# Altium PCB PCB2.PcbDoc (part 2 of 3)
Units mil, origin at the board's own origin, x right, y up, seen from the top; angles counter-clockwise.
Board outline 7874.02 x 7874.02 mil, 2 copper layers (Top Layer, Bottom Layer); 456 components, 298 nets, 1240 pads, 257 vias.
Unrouted connection lines stored in the file: 581.
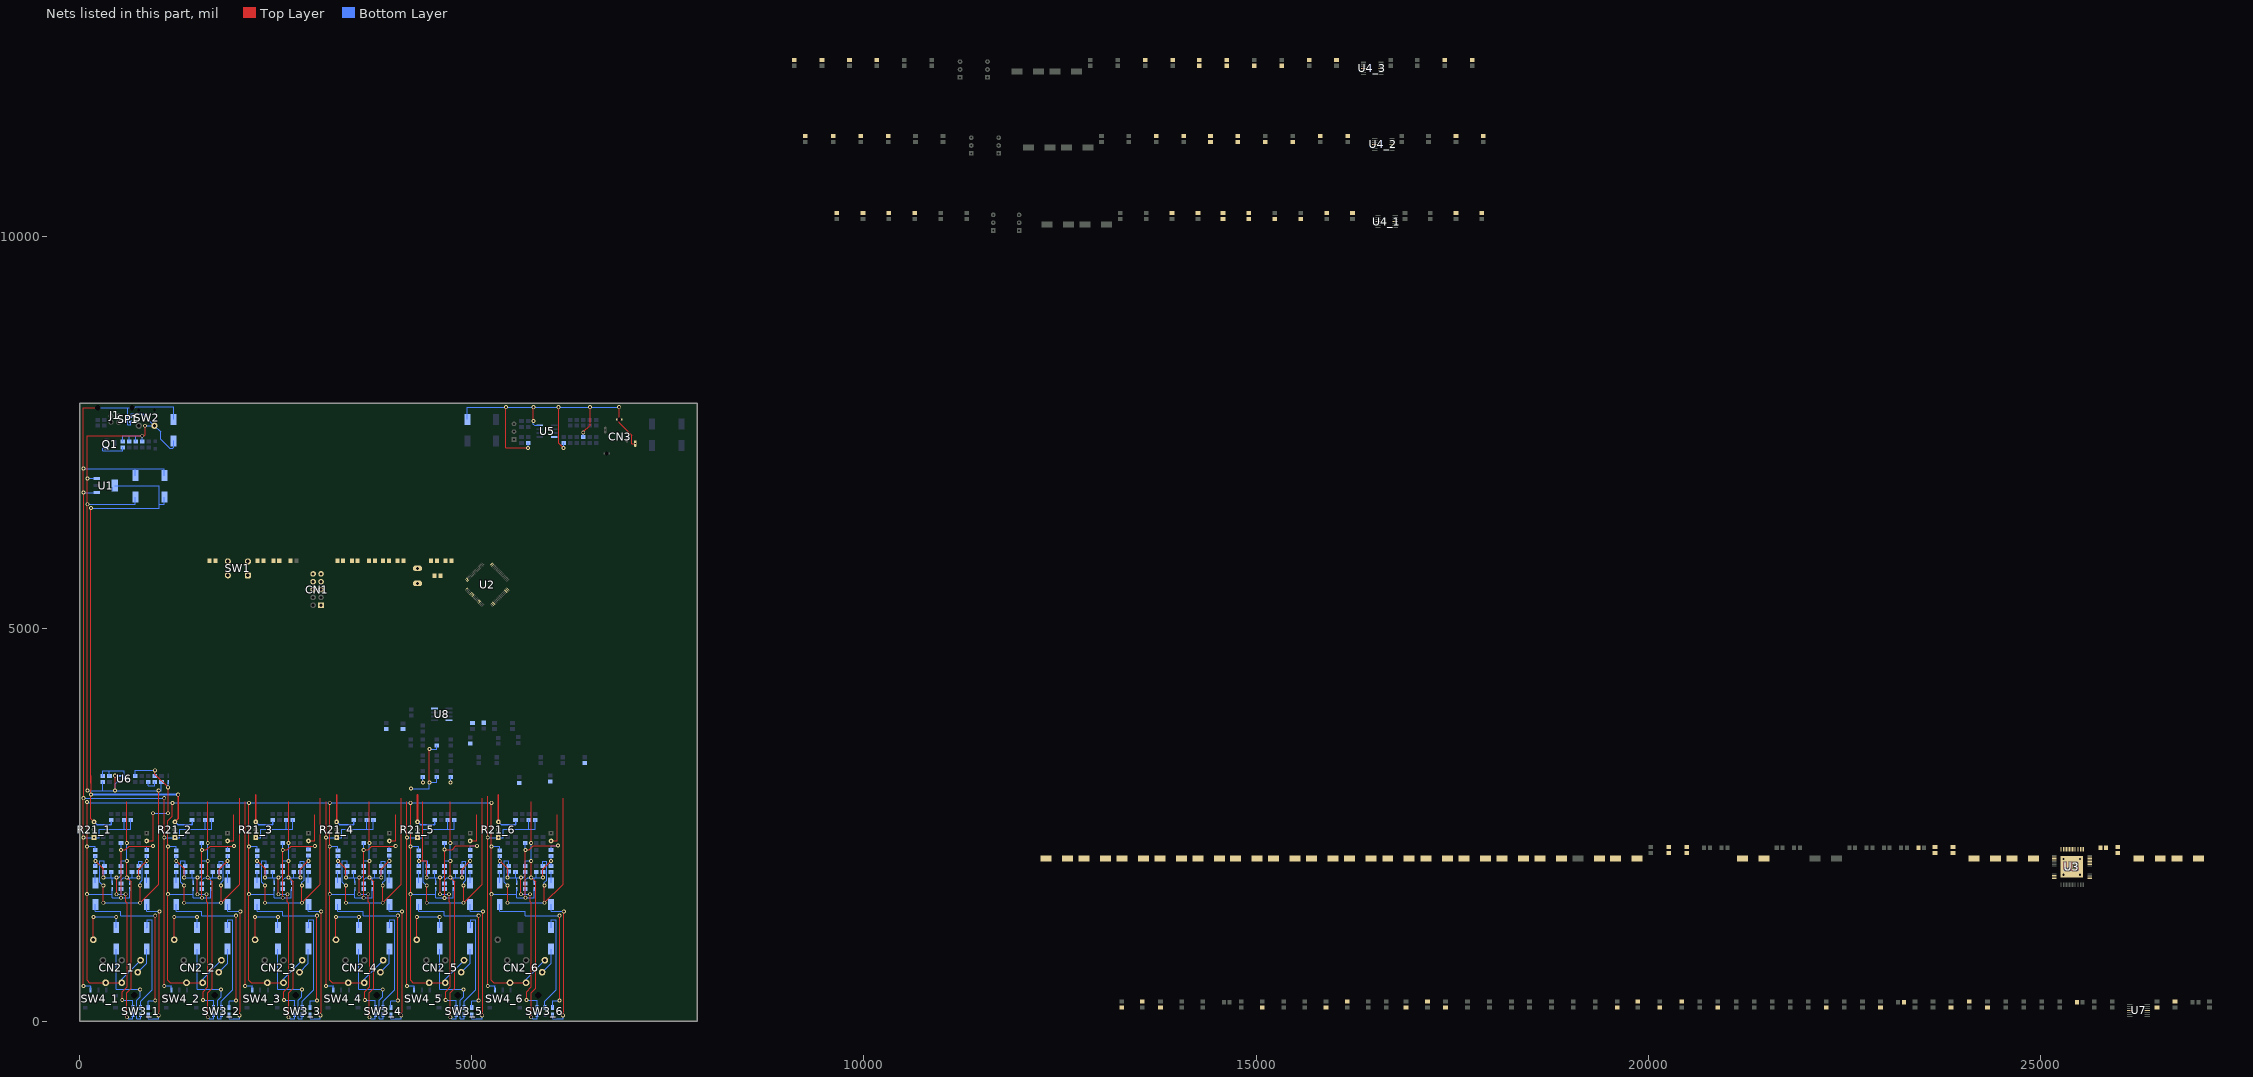
[diagram p2: the nets of this part, all layers, seen from the top]

## Footprints (in the part's own frame and the unit in brackets; to place one, negate y for a bottom-side part, rotate by r counter-clockwise, add the part's x,y. Pads: shape width x height; smd on the part's side, far side on the other; paste and mask are expansions set on the pad) (continued)
XTAL_HC49/US_HS [mm]
  oval 1.8x3 hole 1: 1(-2.44,0) 2(2.44,0)
  silkscreen extent -5.67,-2.32 5.67,2.32, body extent -5.59,-2.29 5.59,2.29, height 1

## Part data
B1: "Conecta distintos planos de masa por una pista"
C3 C4 C5 C6 C7 C8 C9 C10 C11 C12 C13 C15 C17_1 C17_2 C17_3 C17_4 C17_5 C17_6 C21 C22 C25 C26 C29 C30 C49_1 C49_2 C49_3 C49_4 C49_5 C49_6 C50_1 C50_2 C50_3 C50_4 C50_5 C50_6 C51_1 C51_2 C51_3 C52_1 C52_2 C52_3 C53_1 C53_2 C53_3 C54_1 C54_2 C54_3 C55_1 C55_2 C55_3 C56_1 C56_2 C56_3 C59_1 C59_2 C59_3 C60_1 C60_2 C60_3 C61 C63 C66 C68 C69 C70 C71 C72 C73 C74 C75 C76 C77 C78 C79 C80 C81 C82 C83 C84 C85 C86 C87 C88 C89_1 C89_2 C89_3 C89_4 C89_5 C89_6 C90_1 C90_2 C90_3 C90_4 C90_5 C90_6 C91_1 C91_2 C91_3 C91_4 C91_5 C91_6 C92_1 C92_2 C92_3 C92_4 C92_5 C92_6 C93_1 C93_2 C93_3 C93_4 C93_5 C93_6: "Capacitor de placas paralelas", tolerancia=X7R, Encapsulado=0805, tension=25V, Valor=100nF
CN1: "STLINK V2 Mini"
D1: library part Led, Color=Verde, Cod. Proveedor=67-1549-1-ND, Encapsulado=SMD, Link=https://www.digikey.com/product-detail/es/SML-LX0603GW-TR/67-1549-1-ND/304360?utm_campaign=buynow&WT.z_cid=ref_octopart_dkc_buynow&utm_medium=aggregator&curr=usd&site=us&utm_source=octopart, Proveedor=Digi-Key
D2 D3_1 D3_2 D3_3 D3_4 D3_5 D3_6 D4_1 D4_2 D4_3 D4_4 D4_5 D4_6: library part "Schottky Diode", Cod. Proveedor=1727-5845-1-ND, Encapsulado=SOD-128, Fabricante=Nexperia, Link=https://www.digikey.com/product-detail/es/PMEG6010EP,115/1727-5845-1-ND/2697507?utm_campaign=buynow&WT.z_cid=ref_octopart_dkc_buynow&utm_medium=aggregator&curr=usd&site=us&utm_source=octopart, Proveedor=Digi-Key
J1: "Conector micro USB tipo B", Cod. Proveedor=CO4821095, Encapsulado="SMD B TYPE SIDE ENTRY", Proveedor=Elemon
L1: library part Inductor, Cod. Proveedor=478-7137-1-ND, Encapsulado=SMD, Fabricante="AVX Corporation", Link=https://www.digikey.com/product-detail/es/L0201R68AHSTR/500/478-7137-1-ND/3455469?utm_campaign=buynow&WT.z_cid=ref_octopart_dkc_buynow&utm_medium=aggregator&curr=usd&site=us&utm_source=octopart, Proveedor=Digi-Key, Valor=0.68nH
Q1: library part NPN, "NPN", Cod. Proveedor=1727-2918-1-ND, Encapsulado=TO-236AB, Fabricante="Nexperia USA Inc.", Link=https://www.digikey.com/products/es?keywords=1727-2918-1-ND, Proveedor=Digi-Key
R1 R8_1 R8_2 R8_3 R8_4 R8_5 R8_6 R9_1 R9_2 R9_3 R9_4 R9_5 R9_6 R10_1 R10_2 R10_3 R10_4 R10_5 R10_6 R24_1 R24_2 R24_3 R25_1 R25_2 R25_3 R26_1 R26_2 R26_3 R27_1 R27_2 R27_3 R28_1 R28_2 R28_3 R29_1 R29_2 R29_3 R30_1 R30_2 R30_3 R31_1 R31_2 R31_3 R34_1 R34_2 R34_3 R35_1 R35_2 R35_3 R36_1 R36_2 R36_3 R37_1 R37_2 R37_3 R38 R39 R40 R41 R42 R43 R44 R45 R46 R47 R48 R50 R75 R78 R81 R82 R83 R84 R85 R86 R87 R88 R89 R92 R93 R94 R95 R96 R97 R98 R99 R100 R103 R104 R105 R106 R107 R108 R109 R110 R111 R114 R115 R116 R117 R118 R119 R120 R121 R122 R125 R126 R127 R128 R129 R130 R131 R132 R133 R136 R137 R138 R139 R140 R141 R142 R143: "Resistencia", tolerancia=10%, Potencia=1/4W
  R1: Valor=10K
  R8_1 R8_2 R8_3 R8_4 R8_5 R8_6 R34_1 R34_2 R34_3 R35_1 R35_2 R35_3 R39 R43 R47 R81 R85 R92 R97 R103 R107 R114 R118 R125 R129 R136 R140: Valor=1K
  R9_1 R9_2 R9_3 R9_4 R9_5 R9_6: Valor=15K
  R10_1 R10_2 R10_3 R10_4 R10_5 R10_6: Valor=8K2
  R24_1 R24_2 R24_3 R25_1 R25_2 R25_3 R28_1 R28_2 R28_3 R29_1 R29_2 R29_3 R30_1 R30_2 R30_3 R31_1 R31_2 R31_3: Valor=1K5
  R26_1 R26_2 R26_3 R27_1 R27_2 R27_3 R36_1 R36_2 R36_3 R37_1 R37_2 R37_3 R84 R95 R106 R117 R128 R139: Valor=47
  R38 R48 R78 R88 R89 R96 R100 R110 R111 R121 R122 R132 R133 R143: Valor=5K6
  R40 R44 R82 R86 R93 R98 R104 R108 R115 R119 R126 R130 R137 R141: Valor=6K8
  R41 R45: Valor=360R
  R42: Valor=4K7
  R46: Valor=47R
  R50: Valor=100R
  R75: Valor=1M
  R83 R87 R94 R99 R105 R109 R116 R120 R127 R131 R138 R142: Valor=360
R2 R3 R4 R5 R6 R7 R11 R22_1 R22_2 R22_3 R22_4 R22_5 R22_6 R23_1 R23_2 R23_3 R23_4 R23_5 R23_6 R51 R52 R53 R54 R55 R56 R57 R58 R59 R60 R61 R62 R63 R64 R65 R66 R67 R68 R69 R70 R71 R72 R73 R74 R76 R77 R79 R80 R90 R91 R101 R102 R112 R113 R123 R124 R134 R135 R144_1 R144_2 R144_3 R144_4 R144_5 R144_6 R145_1 R145_2 R145_3 R145_4 R145_5 R145_6 R146_1 R146_2 R146_3 R146_4 R146_5 R146_6 R147_1 R147_2 R147_3 R147_4 R147_5 R147_6: "Resistencia", tolerancia=5%
  R2: Potencia=1/10W, Valor=330R
  R3: Potencia=1/10W, Valor=47k
  R4 R5 R6 R7: Potencia=1/10W, Valor=22R
  R11: Potencia=1/10W, Valor=220K
  R22_1 R22_2 R22_3 R22_4 R22_5 R22_6 R144_1 R144_2 R144_3 R144_4 R144_5 R144_6 R147_1 R147_2 R147_3 R147_4 R147_5 R147_6: Potencia=1/4W, Valor=1K
  R23_1 R23_2 R23_3 R23_4 R23_5 R23_6: Potencia=1/4W, Valor=15K
  R51 R52 R53 R54 R55 R56 R57 R58 R59 R60 R61 R62 R63 R64 R65 R66 R67 R68 R69 R70 R71 R72 R73 R74 R79 R80 R90 R91 R101 R102 R112 R113 R123 R124 R134 R135: Potencia=1/4W, Valor=1M
  R76: Potencia=1/4W, Valor=33K
  R77: Potencia=1/4W, Valor=1K8
  R145_1 R145_2 R145_3 R145_4 R145_5 R145_6: Potencia=1/4W, Valor=6K8
  R146_1 R146_2 R146_3 R146_4 R146_5 R146_6: Potencia=1/4W, Valor="6 K8"
R12 R13 R14 R15 R16 R17 R18 R19 R20: "Resistencia", Potencia=1/10W, Valor=100R
R21_1 R21_2 R21_3 R21_4 R21_5 R21_6 R32_1 R32_2 R32_3 R33_1 R33_2 R33_3 R49: library part Potenciometer, tolerancia=10%, Potencia=1/4W, Valor=10K
SP1: library part "Double ESD", "Double rail-to-rail ESD protection diode", Cod. Proveedor=1727-3884-1-ND, Encapsulado=SOT-143B, Link=https://www.digikey.com/product-detail/es/PRTR5V0U2X,215/1727-3884-1-ND/1589981?utm_campaign=buynow&WT.z_cid=ref_octopart_dkc_buynow&utm_medium=aggregator&curr=usd&site=us&utm_source=octopart, Proveedor=Digi-Key
SW1 SW5_1 SW5_2 SW5_3 SW5_4 SW5_5 SW5_6: "Pulsador de 4 pines"
  SW5_1 SW5_2 SW5_3 SW5_4 SW5_5 SW5_6: Cod. Proveedor=GH1365-ND, Encapsulado="Montaje en panel, posterior", Fabricante="Grayhill Inc.", Link=https://www.digikey.com/product-detail/es/30-3/GH1365-ND/686796?utm_campaign=buynow&WT.z_cid=ref_octopart_dkc_buynow&utm_medium=aggregator&curr=usd&site=us&utm_source=octopart, Proveedor=Digi-Key
SW4_1 SW4_2 SW4_3 SW4_4 SW4_5 SW4_6: library part SWITCH_3, "Pulsador de 4 pines", Cod. Proveedor=563-1246-1-ND, Encapsulado=SMD, Fabricante="Nidec Copal Electronics", Link=https://www.digikey.com/product-detail/en/nidec-copal-electronics/CFPA-1FB4-A2T/563-1246-1-ND/2357767, Proveedor=Digi-Key
U1: "LDO Regulator", Cod. Proveedor=LM1117IMP-ADJ/NOPBCT-ND, Encapsulado=SOT-223-4, Fabricante="Texas Instruments", Link=https://www.digikey.com/product-detail/es/LM1117IMP-ADJ-NOPB/LM1117IMP-ADJ-NOPBCT-ND/483060?utm_campaign=buynow&WT.z_cid=ref_octopart_dkc_buynow&utm_medium=aggregator&curr=usd&site=us&utm_source=octopart, Proveedor=Digi-Key
U2: library part STM32F4xxR2, Manufacturer=STMicroelectronics, Manufacturer_Part_Number=stm32f4xxr2, _BOOT0="conectado a VDD o DGND a traves de R=10K", _BOOT0=0="0: Main Flash memory is selected as boot space", _BOOT0=1="1: System memory is selected as boot space", _VDD="Capa de 100nF", Cod. Proveedor=497-17428-ND, Encapsulado=64-LQFP, Link=https://www.digikey.com/product-detail/es/STM32F401RBT6/497-17428-ND/4755972?utm_campaign=buynow&WT.z_cid=ref_octopart_dkc_buynow&utm_medium=aggregator&curr=usd&site=us&utm_source=octopart, Proveedor=Digi-Key, Vendor=STMicroelectronics
U3: library part PCM3168A-Q1_PAP_, Manufacturer="Texas Instruments", Manufacturer_Part_Number=PCM3168A-Q1_PAP_64, Vendor="Texas Instruments"
U4_1 U4_2 U4_3 U7: library part Opamp_x4, "Integrado con 4 operacionales", Cod. Proveedor=296-22024-1-ND, Encapsulado=8-SOIC, Fabricante="Texas Instruments", Link=https://www.digikey.com/product-detail/es/OPA2134UA-2K5/296-22024-1-ND/301154?utm_campaign=buynow&WT.z_cid=ref_octopart_dkc_buynow&utm_medium=aggregator&curr=usd&site=us&utm_source=octopart, Proveedor=Digi-Key
U5: "Integrado con 2 operacionales"
U6: "Low IQ Boost/SEPIC/Inverting Converter with 1A, 60V Switch", Cod. Proveedor=LT8330ES6#TRMPBFCT-ND, Encapsulado=TSOT-23-6, Fabricante="Linear Technology/Analog Devices", Link=https://www.digikey.com/product-detail/es/LT8330ES6%2523TRMPBF/LT8330ES6%2523TRMPBFCT-ND/5361671?utm_campaign=buynow&WT.z_cid=ref_octopart_dkc_buynow&utm_medium=aggregator&curr=usd&site=us&utm_source=octopart, Proveedor=Digi-Key
U8: library part Opamp_x2, "Integrado con 2 operacionales", Cod. Proveedor=296-22024-1-ND, Encapsulado=8-SOIC, Fabricante="Texas Instruments", Link=https://www.digikey.com/product-detail/es/OPA2134UA-2K5/296-22024-1-ND/301154?utm_campaign=buynow&WT.z_cid=ref_octopart_dkc_buynow&utm_medium=aggregator&curr=usd&site=us&utm_source=octopart, Proveedor=Digi-Key
Y1: "Resonador cerámico", frecuencia=8MHZ
C1 C2 C14 C16_1 C16_2 C16_3 C16_4 C16_5 C16_6 C18_1 C18_2 C18_3 C18_4 C18_5 C18_6 C19 C20 C23 C24 C27 C28 C31 C32 C33 C34 C35 C36 C37 C38 C39 C40 C41 C42 C43 C44 C45 C46 C47_1 C47_2 C47_3 C47_4 C47_5 C47_6 C48_1 C48_2 C48_3 C48_4 C48_5 C48_6 C57_1 C57_2 C57_3 C58_1 C58_2 C58_3 C62 C64 C65 C67: tension=16V, Valor=10uF
SW2: Cod. Proveedor=EG2615-ND, Encapsulado=SMD, Fabricante=E-Switch, Link=https://www.digikey.com/product-detail/en/e-switch/800SP9B6M6RE/EG2615-ND/502079, Proveedor=Digi-Key
SW3_1 SW3_2 SW3_3 SW3_4 SW3_5 SW3_6: Cod. Proveedor=CKN10722TR-ND, Encapsulado=SMD, Fabricante=C&K, Link=https://www.digikey.com/product-detail/en/c-k/JS202011JAQN/CKN10722TR-ND/6137629, Proveedor=Digi-Key

## Via types
v1: diameter 50, hole 28, Top Layer to Bottom Layer, 253 vias
v2: diameter 55.12, hole 27.56, Top Layer to Bottom Layer, 4 vias

## Nets (pads, with @x,y where several pads share a name; then routed paths per layer and width w, separated by ;. In a path a pad name is that pad's centre, name@x,y a point inside that pad or via, vN(x,y) a via of type N, cw(c..) or ccw(c..) an arc to the next point about the centre after c; other vN are vias at no path point)
3V3_D: C2.1 C3.1 C4.1 C7.1 C8.1 C9.1 C10.1 C20.1 C22.1 C24.1 C26.1 CN1.7 CN1.8 R21_1.3 R21_2.3 R21_3.3 R21_4.3 R21_5.3 R21_6.3 R22_1.2 R22_2.2 R22_3.2 R22_4.2 R22_5.2 R22_6.2 U1.4 U2.1 U2.13 U2.19 U2.32 U2.48 U2.64 U3.4 U3.12 U3.42 U3.46 | length 10480
  Top Layer w15: 145.18,2931.14 145.18,2949.25 145.85,2949.92 145.85,3124.86 145.18,3125.53 ; 145.21,2933.07 145.21,2888.74 145.21,2579.39 R21_1.3@184.55,2540.06 ; 145.18,3033.96 v1(145.18,6540.35)
  Top Layer w20: R21_2.3@1215.55,2540.06 1257.38,2581.89 v1(1257.38,2886.74) ; R21_3.3@2246.55,2540.06 2246.55,2883.86 ; R21_4.3@3277.56,2540.06 3277.56,2883.86 ; R21_5.3@4308.56,2540.06 4308.56,2884.44 ; R21_6.3@5339.57,2540.06 5339.57,2886.32
  Bottom Layer w15: v1(145.18,6540.35) 1016.24,6540.35 1016.24,6587.11 ; U1.4@448.82,6828.25 1016.24,6828.25 1016.24,6587.11 ; C2.1@1082.67,6678.94 1082.67,6587.11 1016.24,6587.11
  Bottom Layer w20: v1(145.18,2888.78) 1255.34,2888.78 v1(1257.38,2886.74) ; R21_1.3@184.55,2540.06 219.69,2504.92 403.54,2504.92 R22_1.2@403.54,2542.91 ; R21_2.3@1215.55,2540.06 1250.69,2504.92 1434.55,2504.92 R22_2.2@1434.55,2542.91 ; R21_3.3@2246.55,2540.06 2281.69,2504.92 2465.55,2504.92 R22_3.2@2465.55,2542.91 ; R21_4.3@3277.56,2540.06 3312.7,2504.92 3496.56,2504.92 R22_4.2@3496.56,2542.91 ; R21_5.3@4308.56,2540.06 4343.7,2504.92 4527.56,2504.92 R22_5.2@4527.56,2542.91 ; R21_6.3@5339.57,2540.06 5374.7,2504.92 5558.56,2504.92 R22_6.2@5558.56,2542.91
5V: C1.1 C14.1 C15.1 C19.1 C21.1 C23.1 C25.1 C28.1 C29.1 C30.1 C68.1 CN1.9 CN1.10 L1.1 R2.2 R3.2 R4.1 R51.1 R53.1 R55.1 R57.1 R59.1 R61.1 R63.1 R65.1 R67.1 R69.1 R71.1 R73.1 R79.1 R90.1 R101.1 R112.1 R123.1 R134.1 SP1.4 SW2.2 U1.3 U3.3 U3.14 U3.34 U3.49 U4_1.4 U4_2.4 U4_3.4 U5.4 U6.4 U6.6 U7.4 U8.8 | length 28785.3
  Top Layer w15: v1(100.88,2937.96) v1(100.89,6589.57) v1(100.89,6919.29) 100.89,7463.09 v1(799.7,7463.09) 824.31,7463.09 835.93,7474.7 v1(835.93,7590.35) ; v1@302.66,1510.83 v1(302.66,1727.36) ; v1(453.34,2938.57) v1(453.34,3128.57) ; v1(772.64,1727.36) v1(772.64,1508.37) 1008.86,1744.59 v1(1008.86,2937.99) ; v1@1333.66,1510.83 v1(1333.66,1727.36) ; v1(1803.64,1727.36) v1(1803.64,1508.37) 2039.86,1744.59 2039.86,2839.57 ; v1@2364.67,1510.83 v1(2364.67,1727.36) ; v1(2834.65,1727.36) v1(2834.65,1508.37) 3070.87,1744.59 3070.87,2840.15 ; v1@3395.67,1510.83 v1(3395.67,1727.36) ; v1(3865.65,1727.36) v1(3865.65,1508.37) 4101.87,1744.59 4101.87,2839.57 ; v1@4424.21,1508.37 4426.67,1510.83 v1(4426.67,1727.36) ; v1(4896.65,1727.36) v1(4896.65,1508.37) 5132.87,1744.59 5132.87,2839.57 ; v1@5457.68,1511.62 v1(5457.68,1728.16) ; v1(5927.66,1728.16) v1(5927.66,1509.16) 6163.88,1745.38 6163.88,2842.03
  Bottom Layer w15: v1(100.88,2937.96) 139.45,2937.96 139.48,2937.99 297.74,2937.99 ; v1(100.89,6589.57) 123.03,6589.57 711.12,6589.56 C1.1@711.12,6678.94 ; v1(100.89,6919.29) 183.07,6919.29 U1.3@183.56,6918.8 ; C68.1@297.74,3049.81 297.74,2937.99 ; v1(302.66,1508.37) v1(772.64,1508.37) ; v1(302.66,1727.36) 258.37,1771.65 258.37,2042.32 317.42,2042.32 R51.1@317.42,1978.04 ; v1(453.34,3128.57) 523.22,3128.57 U6.6@524.69,3127.09 ; U6.4@524.69,3052.29 478.85,3052.29 453.34,3026.78 v1(453.34,2938.57) ; C15.1@548.72,7389.76 548.72,7463.09 632.38,7463.09 ; R3.2@632.38,7389.76 632.38,7463.09 ; SP1.4@657.48,7705.71 657.48,7741.14 804.63,7741.14 SW2.2@955.41,7590.35 ; R4.1@715.94,7390.45 715.94,7463.09 ; R53.1@752.95,1978.04 752.95,2039.86 801.3,2039.86 801.3,1797.85 772.64,1769.19 v1(772.64,1727.36) ; R2.2@799.6,7390.45 799.7,7390.56 v1(799.7,7463.09) 715.94,7463.09 ; v1(835.93,7590.35) SW2.2@955.41,7590.35 ; L1.1@1043.89,3049.34 1043.89,2937.99 v1(1008.86,2937.99) 453.34,2937.99 v1(453.34,2938.57) ; C14.1@1198.33,7397.45 1198.33,7312.99 1188.48,7303.15 1151.57,7303.15 1033.46,7421.26 1033.46,7512.3 SW2.2@955.41,7590.35 ; v1(1333.66,1508.37) v1(1803.64,1508.37) ; v1(1333.66,1727.36) 1289.37,1771.65 1289.37,2042.32 1348.43,2042.32 R55.1@1348.43,1978.04 ; R57.1@1783.96,1978.04 1783.96,2039.86 1832.3,2039.86 1832.3,1797.85 1803.64,1769.19 v1(1803.64,1727.36) ; v1(2364.67,1508.37) v1(2834.65,1508.37) ; v1(2364.67,1727.36) 2320.37,1771.65 2320.37,2042.32 2379.43,2042.32 R59.1@2379.43,1978.04 ; R61.1@2814.96,1978.04 2814.96,2039.86 2863.31,2039.86 2863.31,1797.85 2834.65,1769.19 v1(2834.65,1727.36) ; v1(3395.67,1508.37) v1(3865.65,1508.37) ; v1(3395.67,1727.36) 3351.38,1771.65 3351.38,2042.32 3410.43,2042.32 R63.1@3410.43,1978.04 ; R65.1@3845.96,1978.04 3845.96,2039.86 3894.31,2039.86 3894.31,1797.85 3865.65,1769.19 v1(3865.65,1727.36) ; v1@4424.21,1508.37 v1(4426.67,1508.37) v1(4896.65,1508.37) ; v1(4426.67,1727.36) 4382.38,1771.65 4382.38,2042.32 4441.44,2042.32 R67.1@4441.44,1978.04 ; R69.1@4876.97,1978.04 4876.97,2039.86 4925.31,2039.86 4925.31,1797.85 4896.65,1769.19 v1(4896.65,1727.36) ; v1(5457.68,1509.16) v1(5927.66,1509.16) ; v1(5457.68,1728.16) 5413.39,1772.45 5413.39,2043.12 5472.44,2043.12 R71.1@5472.44,1978.84 ; R73.1@5907.97,1978.84 5907.97,2040.66 5956.32,2040.66 5956.32,1798.65 5927.66,1769.99 v1(5927.66,1728.16) ; 297.74,2937.99 452.76,2937.99 v1(453.34,2938.57) ; 632.38,7463.09 715.94,7463.09
48V: C69.1 D2.1 R75.2 SW5_1.2 SW5_2.2 SW5_3.2 SW5_4.2 SW5_5.2 SW5_6.2 | length 3770.7
  Top Layer w15: SW5_1.2@856.3,2296.65 937.5,2296.65 v1(937.5,2650.1) ; v1(960.23,3197.47) 960.23,3149.55 v1(1129.43,2980.35) v1(1129.43,2650.1) ; SW5_2.2@1887.3,2296.65 1968.5,2296.65 1968.5,2627.95 ; SW5_3.2@2918.31,2296.65 2999.51,2296.65 2999.51,2627.95 ; SW5_4.2@3949.31,2296.65 4030.51,2296.65 4030.51,2627.95 ; SW5_5.2@4980.31,2296.65 5061.52,2296.65 5061.52,2627.95 ; SW5_6.2@6011.32,2296.65 6092.52,2296.65 6092.52,2627.95
  Bottom Layer w15: R75.2@708.8,3124.61 708.8,3197.47 v1(960.23,3197.47) C69.1@960.23,3124.14 ; v1(937.5,2650.1) v1(1129.43,2650.1) ; v1(1129.43,2980.35) D2.1@1129.43,3046.96
AGND: B1.1 C19.2 C21.2 C23.2 C25.2 C28.2 C29.2 C30.2 C31.2 C32.2 C35.2 C36.2 C59_1.2 C59_2.2 C59_3.2 C60_1.2 C60_2.2 C60_3.2 C66.2 C67.2 C68.2 C69.2 C70.2 C73.2 C77.2 C79.2 C82.2 C85.2 C88.2 C91_1.2 C91_2.2 C91_3.2 C91_4.2 C91_5.2 C91_6.2 CN2_1.1 CN2_1.G CN2_1.S CN2_2.1 CN2_2.G CN2_2.S CN2_3.1 CN2_3.G CN2_3.S CN2_4.1 CN2_4.G CN2_4.S CN2_5.1 CN2_5.G CN2_5.S CN2_6.1 CN2_6.G CN2_6.S CN3.1 CN3.2 D3_1.2 D3_2.2 D3_3.2 D3_4.2 D3_5.2 D3_6.2 D4_1.2 D4_2.2 D4_3.2 D4_4.2 D4_5.2 D4_6.2 R47.1 R48.1 R52.2 R54.2 R56.2 R58.2 R60.2 R62.2 R64.2 R66.2 R68.2 R70.2 R72.2 R74.2 R77.1 R80.2 R88.1 R91.2 R100.1 R102.2 R110.1 R113.2 R121.1 R124.2 R132.1 R135.2 R143.1 U3.2 U3.16 U3.33 U3.39 U3.40 U3.43 U3.44 U3.45 U3.50 U3.EPAD U4_1.11 U4_2.11 U4_3.11 U5.8 U6.2 U7.11 U8.4 | length 43564.2
  Top Layer w15: v1@95.58,1618.3 95.58,519.57 125.87,489.28 CN2_1.S@332.8,489.28 CN2_1.G@537.8,489.28 ; v1@95.58,1619.09 v1@95.58,2226.07 ; v1(96.38,2226.07) v1(96.38,2794.86) ; v1(529.03,1572.32) v1(529.04,2182.58) ; v1(529.04,2182.58) 585.63,2182.58 634.84,2231.79 v1(937.5,2231.79) ; v1@1126.59,1618.3 1126.59,519.57 1156.88,489.28 CN2_2.S@1363.8,489.28 CN2_2.G@1568.8,489.28 ; v1@1126.59,1619.09 v1@1126.59,2226.07 ; v1(1127.38,2226.07) 1127.38,2557.01 1183.56,2613.19 v1(1183.55,2780.48) ; v1(1560.03,1572.32) v1(1560.04,2182.58) ; v1(1560.04,2182.58) 1616.63,2182.58 1665.85,2231.79 v1(1968.5,2231.79) ; v1@2157.59,1618.3 2157.59,519.57 2187.88,489.28 CN2_3.S@2394.8,489.28 CN2_3.G@2599.8,489.28 ; v1@2157.59,1619.09 v1@2157.59,2226.07 ; v1(2158.39,2226.07) v1(2158.39,2782.56) ; v1(2591.04,1572.32) v1(2591.04,2182.58) ; v1(2591.04,2182.58) 2647.64,2182.58 2696.85,2231.79 v1(2999.51,2231.79) ; v1@3188.59,1618.3 3188.59,519.57 3218.89,489.28 CN2_4.S@3425.81,489.28 CN2_4.G@3630.81,489.28 ; v1@3188.59,1619.09 v1@3188.59,2226.07 ; v1(3189.39,2226.07) v1(3189.39,2782.56) ; v1(3622.04,1572.32) v1(3622.05,2182.58) ; v1(3622.05,2182.58) 3678.64,2182.58 3727.85,2231.79 v1(4030.51,2231.79) ; v1@4219.6,1618.3 4219.6,519.57 4249.89,489.28 CN2_5.S@4456.81,489.28 CN2_5.G@4661.81,489.28 ; v1@4219.6,1619.09 v1@4219.6,2226.07 ; v1(4220.39,2226.07) v1(4220.39,2782.56) ; v1(4460.57,3042.81) v1(4460.57,3468.5) ; v1@4650.59,1569.88 4653.04,1572.34 4653.04,2187.49 4751.48,2187.5 4798.23,2234.25 v1(5066.44,2234.25) ; v1@5250.6,1618.3 5250.6,519.57 5280.89,489.28 CN2_6.S@5487.81,489.28 CN2_6.G@5692.81,489.28 ; v1@5250.6,1619.09 v1@5250.6,2226.07 ; v1(5251.4,2226.07) v1(5251.4,2782.56) ; v1(5435.53,7827.26) 5435.53,7308.07 v1(5718.5,7308.07) ; v1(5684.05,1572.32) v1@5684.05,2182.57 ; v1(5684.06,2182.58) 5730.81,2182.58 5784.94,2236.71 v1(6099.9,2236.71) ; v1(5787.4,7650.1) v1(5787.4,7827.26) ; v1(6107.28,7827.26) 6107.28,7369.59 v1(6171.26,7305.61) ; v1(6422.21,7504.83) 6422.21,7512.34 6508.37,7598.5 v1(6508.37,7827.26) ; v1(6879.92,7827.26) CN3.1@6879.92,7669.52 6879.92,7627.96 7039.86,7468.01 7039.86,7362.52 CN3.2@7084.92,7362.52
  Bottom Layer w10: v1(96.76,1618.3) 418.31,1618.3 ; D3_1.2@418.31,1683.86 418.31,1618.3 ; D4_1.2@639.76,1683.86 639.76,1574.8 529.04,1574.8 418.31,1574.8 418.31,1618.3 ; v1(1127.76,1618.3) 1449.31,1618.3 ; D3_2.2@1449.31,1683.86 1449.31,1618.3 ; D4_2.2@1670.77,1683.86 1670.77,1572.34 1449.31,1572.34 1449.31,1618.3 ; v1(2158.77,1618.3) 2480.31,1618.3 ; D3_3.2@2480.32,1683.86 2480.31,1618.3 ; D4_3.2@2701.77,1683.86 2701.77,1574.8 2480.31,1574.8 2480.31,1618.3 ; v1(3189.77,1618.3) 3511.32,1618.3 ; D3_4.2@3511.32,1683.86 3511.32,1618.3 ; D4_4.2@3732.78,1683.86 3732.78,1569.88 3511.32,1569.88 3511.32,1618.3 ; v1(4220.78,1618.3) 4542.32,1618.3 ; D3_5.2@4542.32,1683.86 4542.32,1618.3 ; D4_5.2@4766.24,1681.4 D4_5.2@4763.78,1683.86 4763.78,1572.34 4542.32,1572.34 4542.32,1618.3 ; v1(5251.78,1618.3) 5573.33,1618.3 ; D3_6.2@5573.33,1683.86 5573.33,1618.3 ; D4_6.2@5794.78,1683.86 5794.78,1569.88 5573.33,1569.88 5573.33,1618.3
  Bottom Layer w15: v1@95.96,2795.28 v1(96.38,2794.86) 110.76,2780.48 v1(1183.55,2780.48) v1@2157.97,2780.48 ; v1(96.38,2226.07) 201.77,2226.07 R52.2@201.77,2180.31 ; C68.2@297.74,3124.61 297.74,3189.59 381.98,3189.59 ; C70.2@381.4,3124.61 381.4,3189.01 381.98,3189.59 ; v1(529.03,1572.32) v1@529.04,1574.8 ; v1(529.04,2182.58) C91_1.2@529.04,2272.83 ; CN2_1.G@537.8,489.28 537.8,536.28 CN2_1.1@777.8,776.28 ; U6.2@614.69,3089.69 571.94,3089.69 571.94,3189.59 381.98,3189.59 ; R54.2@856.3,2180.31 856.3,2231.79 v1(937.5,2231.79) ; R77.1@875.98,3049.81 875.98,3003.08 960.23,3003.08 C69.2@960.23,3049.34 ; v1(1127.38,2226.07) 1232.78,2226.07 R56.2@1232.78,2180.31 ; v1(1560.04,2182.58) C91_2.2@1560.04,2272.83 ; CN2_2.G@1568.8,489.28 1568.8,536.28 CN2_2.1@1808.8,776.28 ; R58.2@1887.3,2180.31 1887.3,2231.79 v1(1968.5,2231.79) ; v1@2157.97,2782.97 v1(2158.39,2782.56) v1(3189.39,2782.56) v1(4220.39,2782.56) v1@5250.98,2782.56 ; v1(2158.39,2226.07) 2263.78,2226.07 R60.2@2263.78,2180.31 ; v1(2591.04,2182.58) C91_3.2@2591.04,2272.83 ; CN2_3.G@2599.8,489.28 2599.8,536.28 CN2_3.1@2839.8,776.28 ; R62.2@2918.31,2180.31 2918.31,2231.79 v1(2999.51,2231.79) ; v1(3189.39,2226.07) 3294.78,2226.07 R64.2@3294.78,2180.31 ; v1(3622.05,2182.58) C91_4.2@3622.05,2272.83 ; CN2_4.G@3630.81,489.28 3630.81,536.28 CN2_4.1@3870.81,776.28 ; R66.2@3949.31,2180.31 3949.31,2231.79 v1(4030.51,2231.79) ; v1(4220.39,2226.07) 4325.79,2226.07 R68.2@4325.79,2180.31 ; v1(4224.76,2964.49) 4460.57,2964.49 v1(4460.57,3042.81) 4554.07,3042.81 R132.1@4554.07,3113.68 ; v1(4460.57,3468.5) 4554.07,3468.5 C85.2@4554.07,3512.3 ; v1(4653.05,2187.5) C91_5.2@4653.05,2272.83 ; CN2_5.G@4661.81,489.28 4661.81,536.28 CN2_5.1@4901.81,776.28 ; C67.2@4944.49,7671.45 4944.49,7827.26 v1(5435.53,7827.26) v1(5787.4,7827.26) v1(6107.28,7827.26) v1(6508.37,7827.26) v1(6879.92,7827.26) ; R70.2@4980.31,2180.31 4980.31,2234.25 v1(5066.44,2234.25) ; v1@5250.98,2782.97 v1(5251.4,2782.56) ; v1(5251.4,2226.07) 5356.79,2226.07 R72.2@5356.79,2180.31 ; v1(5684.06,2182.58) C91_6.2@5684.06,2272.83 ; CN2_6.G@5692.81,489.28 5692.81,536.28 CN2_6.1@5932.81,776.28 ; v1(5718.5,7308.07) R47.1@5718.51,7371.56 ; v1(5787.4,7650.1) 5787.4,7610.73 5800.98,7597.15 U5.8@5866.65,7597.15 ; R74.2@6011.32,2180.31 6011.32,2236.71 v1(6099.9,2236.71) ; v1(6171.26,7305.61) C66.2@6171.26,7371.56 ; v1(6422.21,7504.83) R48.1@6422.24,7446.36 R48.1@6422.24,7446.36
  other v1: 4653.05,1569.88
  other v2: 25295.83,1865.61 25505.83,1865.61 25295.83,2065.61 25505.83,2065.61
DGND: B1.2 C1.2 C2.2 C3.2 C4.2 C5.1 C6.1 C7.2 C8.2 C9.2 C10.2 C11.2 C12.2 C13.2 C14.2 C15.2 C20.2 C22.2 C24.2 C26.2 C49_1.2 C49_2.2 C49_3.2 C49_4.2 C49_5.2 C49_6.2 C50_1.2 C50_2.2 C50_3.2 C50_4.2 C50_5.2 C50_6.2 CN1.5 CN1.6 J1.5 J1.6 Q1.2 R1.1 R11.1 R21_1.1 R21_2.1 R21_3.1 R21_4.1 R21_5.1 R21_6.1 SP1.1 SW1.2 SW4_1.3 SW4_2.3 SW4_3.3 SW4_4.3 SW4_5.3 SW4_6.3 U1.1 U2.12 U2.18 U2.31 U2.47 U2.63 U3.11 U3.47 | length 29996.4
  Top Layer w15: v1(49.21,447.83) v1(49.21,2340.06) 49.21,2795.28 ; v1(49.21,6737.7) v1(49.21,7044.78) 49.21,7819.88 J1.6@231.3,7819.88 ; 49.8,2795.86 49.21,2795.28 ; v1@54.13,6737.7 49.21,6732.78 v1(49.21,2842.03) 49.21,2795.28 ; v1(1080.22,447.83) v1(1080.22,2340.06) v1(1080.22,2841.93) ; v1(2111.22,447.83) 2111.22,2795.28 ; v1(3142.22,447.83) v1(3142.22,2340.06) 3142.22,2795.28 ; v1(4173.23,447.83) v1(4173.23,2340.06) 4173.23,2795.28 ; v1(5204.23,447.83) v1(5204.23,2340.06) 5204.23,2864.17
  Bottom Layer w10: v1(49.21,447.83) 138.39,447.83 140.55,445.67 SW4_1.3@140.55,397.64 ; v1(1080.22,447.83) 1169.39,447.83 1171.56,445.67 SW4_2.3@1171.56,397.64 ; v1(2111.22,447.83) 2200.39,447.83 2202.56,445.67 SW4_3.3@2202.56,397.64 ; v1(3142.22,447.83) 3231.4,447.83 3233.56,445.67 SW4_4.3@3233.56,397.64 ; v1(4173.23,447.83) 4262.4,447.83 4264.57,445.67 SW4_5.3@4264.57,397.64 ; v1(5204.23,447.83) 5293.41,447.83 5295.57,445.67 SW4_6.3@5295.57,397.64
  Bottom Layer w15: v1(49.21,2340.06) R21_1.1@184.55,2340.06 248.52,2340.06 248.52,2448.33 570.87,2448.33 ; v1(49.21,2842.03) 81.2,2842.03 v1(1080.22,2841.93) ; v1(49.21,6737.7) U1.1@183.56,6737.7 ; v1(49.21,7044.78) 711.12,7044.78 ; J1.6@231.3,7819.88 612.7,7819.88 ; Q1.2@342.52,7311.52 297.74,7311.52 297.74,7271.16 548.72,7271.16 C15.2@548.72,7314.96 ; C49_1.2@570.87,2566.34 570.87,2448.33 ; SP1.1@649.61,7638.78 649.61,7605.81 612.7,7605.81 612.7,7819.88 ; C50_1.2@654.53,2566.34 654.53,2448.33 570.87,2448.33 ; C1.2@711.12,6952.94 711.12,7044.78 ; v1(1080.22,2340.06) R21_2.1@1215.55,2340.06 1279.53,2340.06 1279.53,2448.33 1601.87,2448.33 ; C2.2@1082.67,6952.94 1082.67,7044.78 711.12,7044.78 ; C14.2@1198.33,7671.45 1198.33,7834.65 718.5,7834.65 703.74,7819.88 J1.5@668.31,7819.88 612.7,7819.88 ; C49_2.2@1601.87,2566.34 1601.87,2448.33 ; C50_2.2@1685.53,2566.34 1685.53,2448.33 1601.87,2448.33 ; R21_3.1@2246.55,2340.06 2310.53,2340.06 2310.53,2448.33 2632.87,2448.33 ; C49_3.2@2632.87,2566.34 2632.87,2448.33 ; C50_3.2@2716.54,2566.34 2716.54,2448.33 2632.87,2448.33 ; v1(3142.22,2340.06) R21_4.1@3277.56,2340.06 3341.54,2340.06 3341.54,2448.33 3663.88,2448.33 ; C49_4.2@3663.88,2566.34 3663.88,2448.33 ; C50_4.2@3747.54,2566.34 3747.54,2448.33 3663.88,2448.33 ; v1(4173.23,2340.06) R21_5.1@4308.56,2340.06 4372.54,2340.06 4372.54,2448.33 4694.88,2448.33 ; C49_5.2@4694.88,2566.34 4694.88,2448.33 ; C50_5.2@4778.54,2566.34 4778.54,2448.33 4694.88,2448.33 ; v1(5204.23,2340.06) R21_6.1@5339.57,2340.06 5403.54,2340.06 5403.54,2448.33 5725.89,2448.33 ; C49_6.2@5725.89,2566.34 5725.89,2448.33 ; C50_6.2@5809.55,2566.34 5809.55,2448.33 5725.89,2448.33
NetC5_2: C5.2 U2.5 Y1.1
NetC6_2: C6.2 U2.6 Y1.2
NetC11_1: C11.1 C12.1 U2.30
NetC13_1: C13.1 CN1.1 SW1.1 U2.7
NetC16_1_1: C16_1.1 R8_1.1 | length 111
  Bottom Layer w15: C16_1.1@201.77,1762.68 201.77,1873.71
NetC16_1_2: C16_1.2 SW3_1.1 | length 2162
  Top Layer w15: v1(964.57,260.83) v1(964.57,1343.5)
  Bottom Layer w15: C16_1.2@201.77,1488.68 201.77,1397.64 525.96,1397.64 525.96,1343.5 v1(964.57,1343.5) ; SW3_1.1@875.98,175.2 875.98,255.91 880.91,260.83 890.75,260.83 v1(964.57,260.83)
NetC16_2_1: C16_2.1 R8_2.1 | length 140.6
  Bottom Layer w15: C16_2.1@1232.78,1762.68 R8_2.1@1232.78,1903.24
NetC16_2_2: C16_2.2 SW3_2.1 | length 2162
  Top Layer w15: v1(1995.57,260.83) v1(1995.57,1343.5)
  Bottom Layer w15: C16_2.2@1232.78,1488.68 1232.78,1397.64 1556.96,1397.64 1556.96,1343.5 v1(1995.57,1343.5) ; SW3_2.1@1906.99,175.2 1906.99,255.91 1911.91,260.83 1921.75,260.83 v1(1995.57,260.83)
NetC16_3_1: C16_3.1 R8_3.1 | length 140.6
  Bottom Layer w15: C16_3.1@2263.78,1762.68 R8_3.1@2263.78,1903.24
NetC16_3_2: C16_3.2 SW3_3.1 | length 2162
  Top Layer w15: v1(3026.57,260.83) v1(3026.57,1343.5)
  Bottom Layer w15: C16_3.2@2263.78,1488.68 2263.78,1397.64 2587.97,1397.64 2587.97,1343.5 v1(3026.57,1343.5) ; SW3_3.1@2937.99,175.2 2937.99,255.91 2942.91,260.83 2952.76,260.83 v1(3026.57,260.83)
NetC16_4_1: C16_4.1 R8_4.1 | length 140.6
  Bottom Layer w15: C16_4.1@3294.78,1762.68 R8_4.1@3294.78,1903.24
NetC16_4_2: C16_4.2 SW3_4.1 | length 2162
  Top Layer w15: v1(4057.58,260.83) v1(4057.58,1343.5)
  Bottom Layer w15: C16_4.2@3294.78,1488.68 3294.78,1397.64 3618.97,1397.64 3618.97,1343.5 v1(4057.58,1343.5) ; SW3_4.1@3969,175.2 3969,255.91 3973.92,260.83 3983.76,260.83 v1(4057.58,260.83)
NetC16_5_1: C16_5.1 R8_5.1 | length 140.6
  Bottom Layer w15: C16_5.1@4325.79,1762.68 R8_5.1@4325.79,1903.24
NetC16_5_2: C16_5.2 SW3_5.1 | length 2162
  Top Layer w15: v1(5088.58,260.83) v1(5088.58,1343.5)
  Bottom Layer w15: C16_5.2@4325.79,1488.68 4325.79,1397.64 4649.98,1397.64 4649.98,1343.5 v1(5088.58,1343.5) ; SW3_5.1@5000,175.2 5000,255.91 5004.92,260.83 5014.76,260.83 v1(5088.58,260.83)
NetC16_6_1: C16_6.1 R8_6.1 | length 140.6
  Bottom Layer w15: C16_6.1@5356.79,1762.68 R8_6.1@5356.79,1903.24
NetC16_6_2: C16_6.2 SW3_6.1 | length 2162
  Top Layer w15: v1(6119.59,260.83) v1(6119.59,1343.5)
  Bottom Layer w15: C16_6.2@5356.79,1488.68 5356.79,1397.64 5680.98,1397.64 5680.98,1343.5 v1(6119.59,1343.5) ; SW3_6.1@6031,175.2 6031,255.91 6035.93,260.83 6045.77,260.83 v1(6119.59,260.83)
NetC17_1_1: C17_1.1 D3_1.1 R8_1.2 R9_1.2 R51.2 R52.1 R81.1 R144_1.1 SW3_1.3 | length 2870.2
  Top Layer w15: v1(201.77,2041.53) 302.66,1940.64 v1(302.66,1829.91) ; v1(472.44,1616.63) v1(472.44,1829.91) ; v1(543.8,268.21) 543.8,376.48 604.92,437.6 604.92,1503.84 588.09,1520.67 v1(588.09,1616.63) ; v1@604.92,1616.63 v1@604.92,1618.3
  Bottom Layer w10: D3_1.1@418.31,1764.36 418.31,1829.91
  Bottom Layer w15: R8_1.2@201.77,1978.04 v1(201.77,2041.53) 201.77,2103.04 R52.1@204.23,2105.5 ; R51.2@317.42,1903.24 317.42,1844.68 v1(302.66,1829.91) 403.54,1829.91 ; R144_1.1@403.54,1903.24 403.54,1829.91 ; v1(472.44,1616.63) 529.04,1616.63 ; C17_1.1@529.04,1681.78 529.04,1616.63 ; R9_1.2@529.04,1886.02 529.04,1859.44 499.51,1829.91 v1(472.44,1829.91) 418.31,1829.91 403.54,1829.91 ; v1(543.8,268.21) 679.13,268.21 SW3_1.3@679.13,175.2 ; v1(588.09,1616.63) 529.04,1616.63
NetC17_1_2: C17_1.2 D4_1.1 R9_1.1 R10_1.2 R53.2 R54.1 R85.1 R147_1.1 SW3_1.6 | length 3895.6
  Top Layer w15: v1(602.85,49.21) 602.85,331.14 603.52,331.81 603.52,362.38 659.45,418.31 659.45,1773.32 v1(602.85,1829.91) v1(602.85,2041.53) ; v1(602.85,2271.16) 602.85,2797.74 ; v1(752.95,1829.91) 752.95,1938.18 v1(856.3,2041.53)
  Bottom Layer w10: D4_1.1@639.76,1764.36 639.76,1829.91
  Bottom Layer w15: C17_1.2@529.04,1773.81 529.04,1800.39 558.56,1829.91 v1(602.85,1829.91) 639.76,1829.91 669.29,1829.91 ; R9_1.1@529.04,1978.04 529.04,2041.53 v1(602.85,2041.53) v1(602.85,2271.16) ; v1(602.85,49.21) 622.54,29.53 679.13,29.53 SW3_1.6@679.13,80.71 ; 669.29,1873.71 669.29,1829.91 ; R53.2@752.95,1903.24 v1(752.95,1829.91) 669.29,1829.91 ; R10_1.2@856.3,1978.04 v1(856.3,2041.53) R54.1@856.3,2105.5
NetC17_2_1: C17_2.1 D3_2.1 R8_2.2 R9_2.2 R55.2 R56.1 R92.1 R144_2.1 SW3_2.3 | length 2866.8
  Top Layer w15: v1(1232.78,2041.53) 1333.66,1940.64 v1(1333.66,1829.91) ; v1(1503.44,1616.63) v1(1503.44,1829.91) ; v1(1574.8,268.21) 1574.8,376.48 1635.93,437.6 1635.93,1503.84 1619.09,1520.67 v1(1619.09,1616.63) ; v1@1635.93,1616.63 v1@1635.93,1618.3
  Bottom Layer w10: D3_2.1@1449.31,1764.36 1449.31,1829.91
  Bottom Layer w15: R8_2.2@1232.78,1978.04 v1(1232.78,2041.53) R56.1@1232.78,2103.04 ; R55.2@1348.43,1903.24 1348.43,1844.68 v1(1333.66,1829.91) 1434.55,1829.91 ; R144_2.1@1434.25,1903.24 1434.25,1830.21 1434.55,1829.91 ; v1(1503.44,1616.63) 1560.04,1616.63 ; C17_2.1@1560.04,1681.78 1560.04,1616.63 ; R9_2.2@1560.04,1886.02 1560.04,1859.44 1530.51,1829.91 v1(1503.44,1829.91) 1449.31,1829.91 1434.55,1829.91 ; v1(1574.8,268.21) 1710.14,268.21 SW3_2.3@1710.14,175.2 ; v1(1619.09,1616.63) 1560.04,1616.63
NetC17_2_2: C17_2.2 D4_2.1 R9_2.1 R10_2.2 R57.2 R58.1 R97.1 R147_2.1 SW3_2.6 | length 3895.6
  Top Layer w15: v1(1633.86,49.21) 1633.86,331.14 1634.53,331.81 1634.53,362.38 1690.45,418.31 1690.45,1773.32 v1(1633.86,1829.91) v1(1633.86,2041.53) ; v1(1633.86,2271.16) 1633.86,2797.74 ; v1(1783.96,1829.91) 1783.96,1938.18 v1(1887.3,2041.53)
  Bottom Layer w10: D4_2.1@1670.77,1764.36 1670.77,1829.91
  Bottom Layer w15: C17_2.2@1560.04,1773.81 1560.04,1800.39 1589.57,1829.91 v1(1633.86,1829.91) 1670.77,1829.91 1700.3,1829.91 ; R9_2.1@1560.04,1978.04 1560.04,2041.53 v1(1633.86,2041.53) v1(1633.86,2271.16) ; v1(1633.86,49.21) 1653.54,29.53 1710.14,29.53 SW3_2.6@1710.14,80.71 ; 1700.3,1873.71 1700.3,1829.91 ; R57.2@1783.96,1903.24 v1(1783.96,1829.91) 1700.3,1829.91 ; R10_2.2@1887.3,1978.04 v1(1887.3,2041.53) R58.1@1887.3,2105.5
NetC17_3_1: C17_3.1 D3_3.1 R8_3.2 R9_3.2 R59.2 R60.1 R144_3.1 | length 2866.8
  Top Layer w15: v1(2263.78,2041.53) 2364.67,1940.64 v1(2364.67,1829.91) ; v1(2534.45,1616.63) v1(2534.45,1829.91) ; v1(2605.81,268.21) 2605.81,376.48 2666.93,437.6 2666.93,1503.84 2650.1,1520.67 v1(2650.1,1616.63) ; v1@2666.93,1616.63 v1@2666.93,1618.3
  Bottom Layer w10: D3_3.1@2480.32,1764.36 2480.31,1829.91
  Bottom Layer w15: R8_3.2@2263.78,1978.04 v1(2263.78,2041.53) R60.1@2263.78,2103.04 ; R59.2@2379.43,1903.24 2379.43,1844.68 v1(2364.67,1829.91) 2465.55,1829.91 ; R144_3.1@2465.26,1903.24 2465.26,1830.21 2465.55,1829.91 ; v1(2534.45,1616.63) 2591.04,1616.63 ; C17_3.1@2591.04,1681.78 2591.04,1616.63 ; R9_3.2@2591.04,1886.02 2591.04,1859.44 2561.52,1829.91 v1(2534.45,1829.91) 2480.31,1829.91 2465.55,1829.91 ; v1(2605.81,268.21) 2741.14,268.21 2741.14,175.2 ; v1(2650.1,1616.63) 2591.04,1616.63
NetC17_3_2: C17_3.2 D4_3.1 R9_3.1 R10_3.2 R61.2 R62.1 R107.1 R147_3.1 SW3_3.6 | length 3895.6
  Top Layer w15: v1(2664.86,49.21) 2664.86,331.14 2665.53,331.81 2665.53,362.38 2721.46,418.31 2721.46,1773.32 v1(2664.86,1829.91) v1(2664.86,2041.53) ; v1(2664.86,2271.16) 2664.86,2797.74 ; v1(2814.96,1829.91) 2814.96,1938.18 v1(2918.31,2041.53)
  Bottom Layer w10: D4_3.1@2701.77,1764.36 2701.77,1829.91
  Bottom Layer w15: C17_3.2@2591.04,1773.81 2591.04,1800.39 2620.57,1829.91 v1(2664.86,1829.91) 2701.77,1829.91 2731.3,1829.91 ; R9_3.1@2591.04,1978.04 2591.04,2041.53 v1(2664.86,2041.53) v1(2664.86,2271.16) ; v1(2664.86,49.21) 2684.55,29.53 2741.14,29.53 SW3_3.6@2741.14,80.71 ; 2731.3,1873.71 2731.3,1829.91 ; R61.2@2814.96,1903.24 v1(2814.96,1829.91) 2731.3,1829.91 ; R10_3.2@2918.31,1978.04 v1(2918.31,2041.53) R62.1@2918.31,2105.5
NetC17_4_1: C17_4.1 D3_4.1 R8_4.2 R9_4.2 R63.2 R64.1 R118.1 R144_4.1 SW3_4.3 | length 2866.8
  Top Layer w15: v1(3294.78,2041.53) 3395.67,1940.64 v1(3395.67,1829.91) ; v1(3565.45,1616.63) v1(3565.45,1829.91) ; v1(3636.81,268.21) 3636.81,376.48 3697.93,437.6 3697.93,1503.84 3681.1,1520.67 v1(3681.1,1616.63) ; v1@3697.93,1616.63 v1@3697.93,1618.3
  Bottom Layer w10: D3_4.1@3511.32,1764.36 3511.32,1829.91
  Bottom Layer w15: R8_4.2@3294.78,1978.04 v1(3294.78,2041.53) R64.1@3294.78,2103.04 ; R63.2@3410.43,1903.24 3410.43,1844.68 v1(3395.67,1829.91) 3496.56,1829.91 ; R144_4.1@3496.26,1903.24 3496.26,1830.21 3496.56,1829.91 ; v1(3565.45,1616.63) 3622.05,1616.63 ; C17_4.1@3622.05,1681.78 3622.05,1616.63 ; R9_4.2@3622.05,1886.02 3622.05,1859.44 3592.52,1829.91 v1(3565.45,1829.91) 3511.32,1829.91 3496.56,1829.91 ; v1(3636.81,268.21) 3772.15,268.21 SW3_4.3@3772.15,175.2 ; v1(3681.1,1616.63) 3622.05,1616.63
NetC17_4_2: C17_4.2 D4_4.1 R9_4.1 R10_4.2 R65.2 R66.1 R114.1 R147_4.1 SW3_4.6 | length 3895.6
  Top Layer w15: v1(3695.87,49.21) 3695.87,331.14 3696.54,331.81 3696.54,362.38 3752.46,418.31 3752.46,1773.32 v1(3695.87,1829.91) v1(3695.87,2041.53) ; v1(3695.87,2271.16) 3695.87,2797.74 ; v1(3845.96,1829.91) 3845.96,1938.18 v1(3949.31,2041.53)
  Bottom Layer w10: D4_4.1@3732.78,1764.36 3732.78,1829.91
  Bottom Layer w15: C17_4.2@3622.05,1773.81 3622.05,1800.39 3651.57,1829.91 v1(3695.87,1829.91) 3732.78,1829.91 3762.3,1829.91 ; R9_4.1@3622.05,1978.04 3622.05,2041.53 v1(3695.87,2041.53) v1(3695.87,2271.16) ; v1(3695.87,49.21) 3715.55,29.53 3772.15,29.53 SW3_4.6@3772.15,80.71 ; 3762.3,1873.71 3762.3,1829.91 ; R65.2@3845.96,1903.24 v1(3845.96,1829.91) 3762.3,1829.91 ; R10_4.2@3949.31,1978.04 v1(3949.31,2041.53) R66.1@3949.31,2105.5
NetC17_5_1: C17_5.1 D3_5.1 R8_5.2 R9_5.2 R67.2 R68.1 R125.1 R144_5.1 SW3_5.3 | length 3753
  Top Layer w15: v1(4325.79,2041.53) 4372.54,2041.53 ; 4372.54,2797.74 4372.54,2620.57 4372.54,2041.53 ; v1(4426.67,1829.91) 4426.67,2041.53 4372.54,2041.53 ; v1(4596.46,1616.63) v1(4596.46,1829.91) ; v1(4667.81,268.21) 4667.81,376.48 4728.94,437.6 4728.94,1503.84 4712.11,1520.67 v1(4712.11,1616.63) ; v1@4728.94,1616.63 v1@4728.94,1618.3
  Bottom Layer w10: D3_5.1@4542.32,1764.36 4542.32,1829.91
  Bottom Layer w15: R8_5.2@4325.79,1978.04 v1(4325.79,2041.53) R68.1@4325.79,2103.04 ; v1(4376.91,3042.81) R125.1@4376.91,3113.68 ; R67.2@4441.44,1903.24 4441.44,1844.68 v1(4426.67,1829.91) 4527.56,1829.91 ; R144_5.1@4527.26,1903.24 4527.26,1830.21 4527.56,1829.91 ; v1(4596.46,1616.63) 4653.05,1616.63 ; C17_5.1@4653.05,1681.78 4653.05,1616.63 ; R9_5.2@4653.05,1886.02 4653.05,1859.44 4623.52,1829.91 v1(4596.46,1829.91) 4542.32,1829.91 4527.56,1829.91 ; v1(4667.81,268.21) 4803.15,268.21 SW3_5.3@4803.15,175.2 ; v1(4712.11,1616.63) 4653.05,1616.63
NetC17_5_2: C17_5.2 D4_5.1 R9_5.1 R10_5.2 R69.2 R70.1 R129.1 R147_5.1 SW3_5.6 | length 3966.5
  Top Layer w15: v1(4726.87,49.21) 4726.87,331.14 4727.54,331.81 4727.54,362.38 4783.46,418.31 4783.46,1773.32 v1(4726.87,1829.91) v1(4726.87,2041.53) ; v1(4726.87,2271.16) 4726.87,2797.74 ; v1(4876.97,1829.91) 4876.97,1938.18 v1(4980.31,2041.53)
  Bottom Layer w10: D4_5.1@4763.78,1764.36 4763.78,1829.91
  Bottom Layer w15: C17_5.2@4653.05,1773.81 4653.05,1800.39 4682.58,1829.91 v1(4726.87,1829.91) 4763.78,1829.91 4793.31,1829.91 ; R9_5.1@4653.05,1978.04 4653.05,2041.53 v1(4726.87,2041.53) v1(4726.87,2271.16) ; v1(4726.87,49.21) 4746.56,29.53 4803.15,29.53 SW3_5.6@4803.15,80.71 ; v1(4731.24,3042.81) R129.1@4731.24,3113.68 ; 4793.31,1873.71 4793.31,1829.91 ; R69.2@4876.97,1903.24 v1(4876.97,1829.91) 4793.31,1829.91 ; R10_5.2@4980.31,1978.04 v1(4980.31,2041.53) R70.1@4980.31,2105.5
NetC17_6_1: C17_6.1 D3_6.1 R8_6.2 R9_6.2 R71.2 R72.1 R136.1 R144_6.1 SW3_6.3 | length 2867.6
  Top Layer w15: v1(5356.79,2041.53) 5457.68,1940.64 v1(5457.68,1829.91) ; v1(5627.46,1616.63) v1(5627.46,1829.91) ; v1(5698.82,268.21) 5698.82,376.48 5759.94,437.6 5759.94,1503.84 5743.11,1520.67 v1(5743.11,1616.63) ; v1@5759.94,1616.63 v1@5759.94,1618.3
  Bottom Layer w10: D3_6.1@5573.33,1764.36 5573.33,1829.91
  Bottom Layer w15: R8_6.2@5356.79,1978.04 v1(5356.79,2041.53) R72.1@5356.79,2103.04 ; R71.2@5472.44,1904.04 5472.44,1844.68 v1(5457.68,1829.91) 5558.56,1829.91 ; R144_6.1@5558.27,1903.24 5558.27,1830.21 5558.56,1829.91 ; v1(5627.46,1616.63) 5684.06,1616.63 ; C17_6.1@5684.06,1681.78 5684.06,1616.63 ; R9_6.2@5684.06,1886.02 5684.06,1859.44 5654.53,1829.91 v1(5627.46,1829.91) 5573.33,1829.91 5558.56,1829.91 ; v1(5698.82,268.21) 5834.15,268.21 SW3_6.3@5834.15,175.2 ; v1(5743.11,1616.63) 5684.06,1616.63
NetC17_6_2: C17_6.2 D4_6.1 R9_6.1 R10_6.2 R73.2 R74.1 R140.1 R147_6.1 SW3_6.6 | length 3895.6
  Top Layer w15: v1(5757.87,49.21) 5757.87,331.14 5758.54,331.81 5758.54,362.38 5814.47,418.31 5814.47,1773.32 v1(5757.87,1829.91) v1(5757.87,2041.53) ; v1(5757.87,2271.16) 5757.87,2797.74 ; v1(5907.97,1829.91) 5907.97,1938.18 v1(6011.32,2041.53)
  Bottom Layer w10: D4_6.1@5794.78,1764.36 5794.78,1829.91
  Bottom Layer w15: C17_6.2@5684.06,1773.81 5684.06,1800.39 5713.58,1829.91 v1(5757.87,1829.91) 5794.78,1829.91 5824.31,1829.91 ; R9_6.1@5684.06,1978.04 5684.06,2041.53 v1(5757.87,2041.53) v1(5757.87,2271.16) ; v1(5757.87,49.21) 5777.56,29.53 5834.15,29.53 SW3_6.6@5834.15,80.71 ; 5824.31,1873.71 5824.31,1829.91 ; R73.2@5907.97,1903.24 v1(5907.97,1829.91) 5824.31,1829.91 ; R10_6.2@6011.32,1978.04 v1(6011.32,2041.53) R74.1@6011.32,2105.5
NetC18_1_1: C18_1.1 R10_1.1 | length 111
  Bottom Layer w15: C18_1.1@856.3,1762.68 856.3,1873.71
NetC18_1_2: C18_1.2 SW3_1.4 | length 1809.7
  Top Layer w15: v1(1008.86,73.82) 1008.86,108.27 1018.7,118.11 v1(1018.7,1397.64)
  Bottom Layer w15: C18_1.2@856.3,1488.68 856.3,1397.64 v1(1018.7,1397.64) ; SW3_1.4@875.98,80.71 875.98,29.53 1008.86,29.53 v1(1008.86,73.82)
NetC18_2_1: C18_2.1 R10_2.1 | length 140.6
  Bottom Layer w15: C18_2.1@1887.3,1762.68 R10_2.1@1887.3,1903.24
NetC18_2_2: C18_2.2 SW3_2.4 | length 1809.7
  Top Layer w15: v1(2039.86,73.82) 2039.86,108.27 2049.7,118.11 v1(2049.7,1397.64)
  Bottom Layer w15: C18_2.2@1887.3,1488.68 1887.3,1397.64 v1(2049.7,1397.64) ; SW3_2.4@1906.99,80.71 1906.99,29.53 2039.86,29.53 v1(2039.86,73.82)
NetC18_3_1: C18_3.1 R10_3.1 | length 140.6
  Bottom Layer w15: C18_3.1@2918.31,1762.68 R10_3.1@2918.31,1903.24
NetC18_3_2: C18_3.2 SW3_3.4 | length 1809.7
  Top Layer w15: v1(3070.87,73.82) 3070.87,108.27 3080.71,118.11 v1(3080.71,1397.64)
  Bottom Layer w15: C18_3.2@2918.31,1488.68 2918.31,1397.64 v1(3080.71,1397.64) ; SW3_3.4@2937.99,80.71 2937.99,29.53 3070.87,29.53 v1(3070.87,73.82)
NetC18_4_1: C18_4.1 R10_4.1 | length 140.6
  Bottom Layer w15: C18_4.1@3949.31,1762.68 R10_4.1@3949.31,1903.24
NetC18_4_2: C18_4.2 SW3_4.4 | length 1809.7
  Top Layer w15: v1(4101.87,73.82) 4101.87,108.27 4111.71,118.11 v1(4111.71,1397.64)
  Bottom Layer w15: C18_4.2@3949.31,1488.68 3949.31,1397.64 v1(4111.71,1397.64) ; SW3_4.4@3969,80.71 3969,29.53 4101.87,29.53 v1(4101.87,73.82)
NetC18_5_1: C18_5.1 R10_5.1 | length 140.6
  Bottom Layer w15: C18_5.1@4980.31,1762.68 R10_5.1@4980.31,1903.24
NetC18_5_2: C18_5.2 SW3_5.4 | length 1809.7
  Top Layer w15: v1(5132.87,73.82) 5132.87,108.27 5142.72,118.11 v1(5142.72,1397.64)
  Bottom Layer w15: C18_5.2@4980.31,1488.68 4980.31,1397.64 v1(5142.72,1397.64) ; SW3_5.4@5000,80.71 5000,29.53 5132.87,29.53 v1(5132.87,73.82)
NetC18_6_1: C18_6.1 R10_6.1 | length 140.6
  Bottom Layer w15: C18_6.1@6011.32,1762.68 R10_6.1@6011.32,1903.24
NetC18_6_2: C18_6.2 SW3_6.4 | length 1809.7
  Top Layer w15: v1(6163.88,73.82) 6163.88,108.27 6173.72,118.11 v1(6173.72,1397.64)
  Bottom Layer w15: C18_6.2@6011.32,1488.68 6011.32,1397.64 v1(6173.72,1397.64) ; SW3_6.4@6031,80.71 6031,29.53 6163.88,29.53 v1(6163.88,73.82)
NetC32_1: C32.1 U3.59
NetC33_1: C33.1 C53_1.1 R24_1.2 R26_1.2
NetC33_2: C33.2 U3.52
NetC34_1: C34.1 C53_1.2 R28_1.1 R30_1.2 R36_1.2
NetC34_2: C34.2 U3.51
NetC35_1: C35.1 U3.15
NetC36_1: C36.1 U3.60
NetC37_1: C37.1 C54_1.1 R25_1.2 R27_1.2
NetC37_2: C37.2 U3.54
NetC38_1: C38.1 C54_1.2 R29_1.1 R31_1.2 R37_1.2
NetC38_2: C38.2 U3.53
NetC39_1: C39.1 C53_2.1 R24_2.2 R26_2.2
NetC39_2: C39.2 U3.56
NetC40_1: C40.1 C53_2.2 R28_2.1 R30_2.2 R36_2.2
NetC40_2: C40.2 U3.55
NetC41_1: C41.1 C54_2.1 R25_2.2 R27_2.2
NetC41_2: C41.2 U3.58
NetC42_1: C42.1 C54_2.2 R29_2.1 R31_2.2 R37_2.2
NetC42_2: C42.2 U3.57
NetC43_1: C43.1 C53_3.1 R24_3.2 R26_3.2
NetC43_2: C43.2 U3.62
NetC44_1: C44.1 C53_3.2 R28_3.1 R30_3.2 R36_3.2
NetC44_2: C44.2 U3.61
NetC45_1: C45.1 C54_3.1 R25_3.2 R27_3.2
NetC45_2: C45.2 U3.64
NetC46_1: C46.1 C54_3.2 R29_3.1 R31_3.2 R37_3.2
NetC46_2: C46.2 U3.63
NetC47_1_1: C47_1.1 SW3_1.2 | length 1350.4
  Bottom Layer w15: SW3_1.2@777.56,175.2 777.56,250.98 925.2,398.62 925.2,1294.29 861.22,1294.29 861.22,1195.07 C47_1.1@856.3,1190.15
NetC47_1_2: C47_1.2 CN2_1.R | length 339.9
  Bottom Layer w15: CN2_1.R@742.8,623.28 856.3,736.79 C47_1.2@856.3,916.15
NetC47_2_1: C47_2.1 SW3_2.2 | length 1350.4
  Bottom Layer w15: SW3_2.2@1808.56,175.2 1808.56,250.98 1956.2,398.62 1956.2,1294.29 1892.22,1294.29 1892.22,1195.07 C47_2.1@1887.3,1190.15
NetC47_2_2: C47_2.2 CN2_2.R | length 339.9
  Bottom Layer w15: CN2_2.R@1773.8,623.28 1887.3,736.79 C47_2.2@1887.3,916.15
NetC47_3_1: C47_3.1 SW3_3.2 | length 1350.4
  Bottom Layer w15: SW3_3.2@2839.57,175.2 2839.57,250.98 2987.2,398.62 2987.2,1294.29 2923.23,1294.29 2923.23,1195.07 C47_3.1@2918.31,1190.15
NetC47_3_2: C47_3.2 CN2_3.R | length 339.9
  Bottom Layer w15: CN2_3.R@2804.8,623.28 2918.31,736.79 C47_3.2@2918.31,916.15
NetC47_4_1: C47_4.1 SW3_4.2 | length 1350.4
  Bottom Layer w15: SW3_4.2@3870.57,175.2 3870.57,250.98 4018.21,398.62 4018.21,1294.29 3954.23,1294.29 3954.23,1195.07 C47_4.1@3949.31,1190.15
NetC47_4_2: C47_4.2 CN2_4.R | length 339.9
  Bottom Layer w15: CN2_4.R@3835.81,623.28 3949.31,736.79 C47_4.2@3949.31,916.15
NetC47_5_1: C47_5.1 SW3_5.2 | length 1350.4
  Bottom Layer w15: SW3_5.2@4901.57,175.2 4901.57,250.98 5049.21,398.62 5049.21,1294.29 4985.24,1294.29 4985.24,1195.07 C47_5.1@4980.31,1190.15
NetC47_5_2: C47_5.2 CN2_5.R | length 339.9
  Bottom Layer w15: CN2_5.R@4866.81,623.28 4980.31,736.79 C47_5.2@4980.31,916.15
NetC47_6_1: C47_6.1 SW3_6.2 | length 1350.4
  Bottom Layer w15: SW3_6.2@5932.58,175.2 5932.58,250.98 6080.22,398.62 6080.22,1294.29 6016.24,1294.29 6016.24,1195.07 C47_6.1@6011.32,1190.15
NetC47_6_2: C47_6.2 CN2_6.R | length 339.9
  Bottom Layer w15: CN2_6.R@5897.81,623.28 6011.32,736.79 C47_6.2@6011.32,916.15
NetC48_1_1: C48_1.1 SW3_1.5 | length 1310.5
  Bottom Layer w15: C48_1.1@467.52,916.15 467.52,656.99 467.52,403.54 v1(772.64,403.54) 772.64,310.04 728.35,265.75 728.35,29.53 777.56,29.53 SW3_1.5@777.56,80.71
NetC48_1_2: C48_1.2 CN2_1.T | length 722
  Top Layer w15: CN2_1.T@175.8,1036.28 v1(175.8,1327.37) v1@177.18,1328.75
  Bottom Layer w15: v1@177.18,1328.75 v1(467.52,1328.75) C48_1.2@467.52,1190.15
NetC48_2_1: C48_2.1 SW3_2.5 | length 1310.5
  Bottom Layer w15: C48_2.1@1498.52,916.15 1498.52,656.99 1498.52,403.54 v1(1803.64,403.54) 1803.64,310.04 1759.35,265.75 1759.35,29.53 1808.56,29.53 SW3_2.5@1808.56,80.71
NetC48_2_2: C48_2.2 CN2_2.T | length 722
  Top Layer w15: CN2_2.T@1206.8,1036.28 v1(1206.8,1327.37) v1@1208.18,1328.75
  Bottom Layer w15: v1@1208.18,1328.75 v1(1498.53,1328.75) C48_2.2@1498.53,1190.15
NetC48_3_1: C48_3.1 SW3_3.5 | length 1310.5
  Bottom Layer w15: C48_3.1@2529.53,916.15 2529.53,656.99 2529.53,403.54 v1(2834.65,403.54) 2834.65,310.04 2790.35,265.75 2790.35,29.53 2839.57,29.53 SW3_3.5@2839.57,80.71
NetC48_3_2: C48_3.2 CN2_3.T | length 722
  Top Layer w15: CN2_3.T@2237.8,1036.28 v1(2237.8,1327.37) v1@2239.18,1328.75
  Bottom Layer w15: v1@2239.18,1328.75 v1(2529.53,1328.75) C48_3.2@2529.53,1190.15
NetC48_4_1: C48_4.1 SW3_4.5 | length 1310.5
  Bottom Layer w15: C48_4.1@3560.53,916.15 3560.53,656.99 3560.53,403.54 v1(3865.65,403.54) 3865.65,310.04 3821.36,265.75 3821.36,29.53 3870.57,29.53 SW3_4.5@3870.57,80.71
NetC48_4_2: C48_4.2 CN2_4.T | length 722
  Top Layer w15: CN2_4.T@3268.81,1036.28 v1(3268.81,1327.37) v1@3270.19,1328.75
  Bottom Layer w15: v1@3270.19,1328.75 v1(3560.54,1328.75) C48_4.2@3560.54,1190.15
NetC48_5_1: C48_5.1 SW3_5.5 | length 1310.5
  Bottom Layer w15: C48_5.1@4591.54,916.15 4591.54,656.99 4591.54,403.54 v1(4896.65,403.54) 4896.65,310.04 4852.36,265.75 4852.36,29.53 4901.57,29.53 SW3_5.5@4901.57,80.71
NetC48_5_2: C48_5.2 CN2_5.T | length 722
  Top Layer w15: CN2_5.T@4299.81,1036.28 v1(4299.81,1327.37) v1@4301.19,1328.75
  Bottom Layer w15: v1@4301.19,1328.75 v1(4591.54,1328.75) C48_5.2@4591.54,1190.15